# Altium PCB PCB_V1.0.PcbDoc (part 3 of 3)
Units mil, origin at the board's own origin, x right, y up, seen from the top; angles counter-clockwise.
Board outline 2129.51 x 1160.38 mil, 4 copper layers (L1, L2(GND), L3(PWR), L4), stack 62.45 mil thick; 40 components, 40 nets, 186 pads, 192 vias.
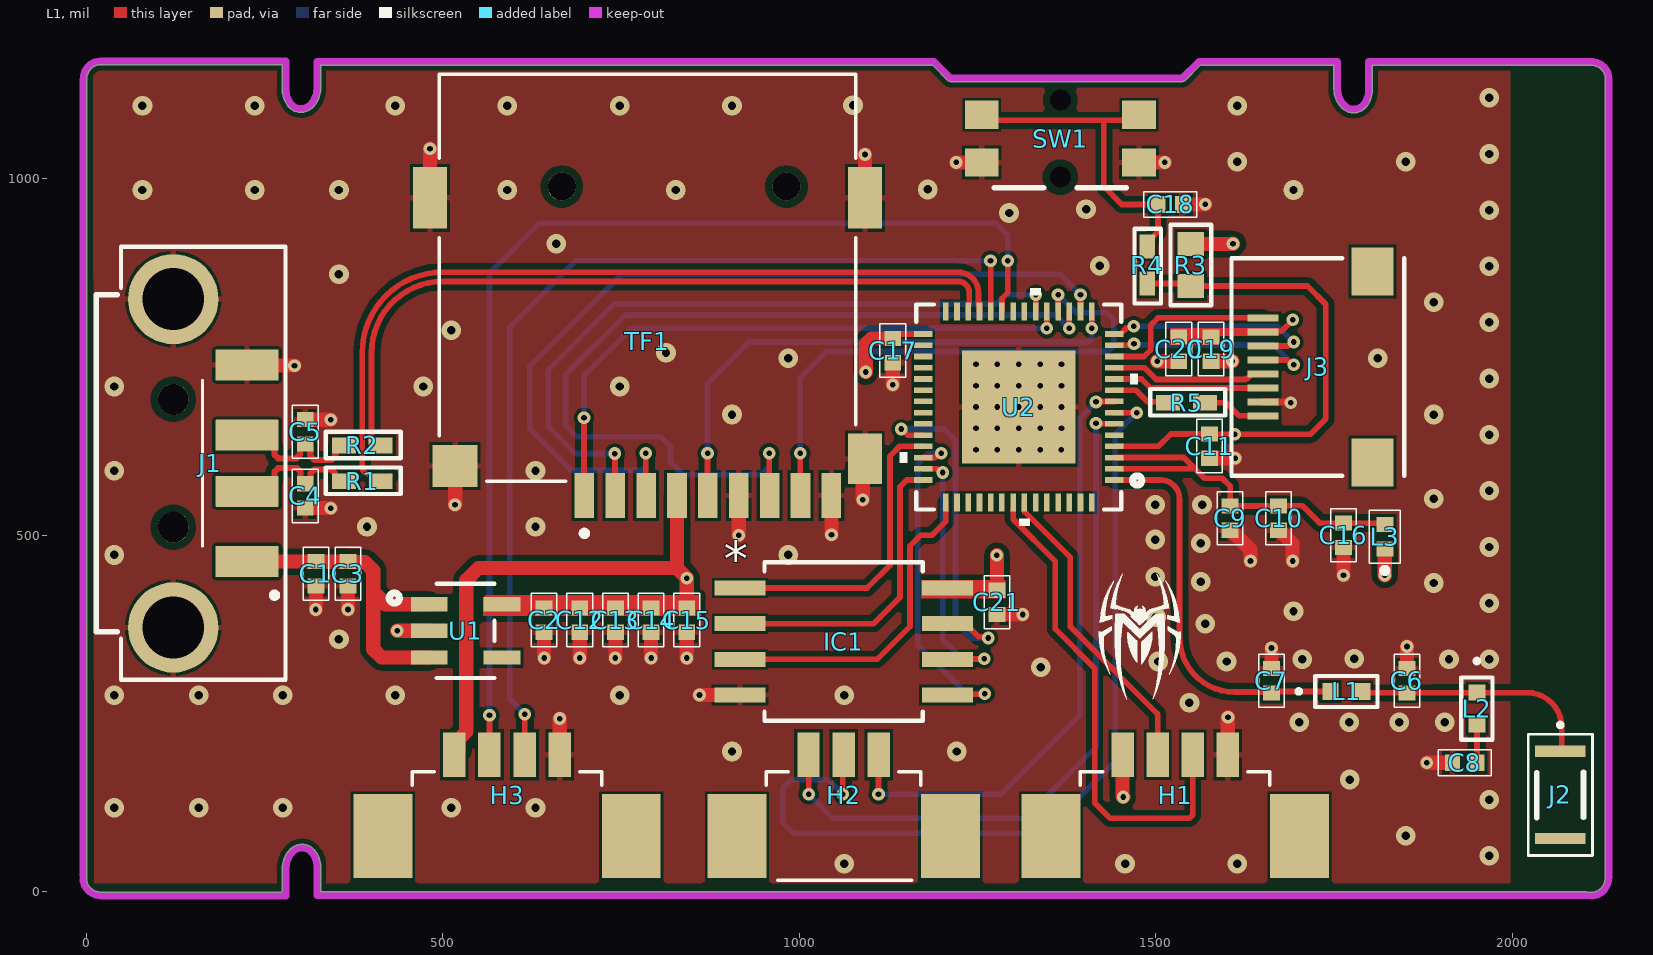
[diagram p0: L1 view]

## Via types
v1: diameter 17.72, hole 7.87, L1 to L4, tented both sides, 100 vias
v2: diameter 27.56, hole 11.81, L1 to L4, tented both sides, 92 vias

## Nets (pads, with @x,y where several pads share a name; then routed paths per layer and width w, separated by ;. In a path a pad name is that pad's centre, name@x,y a point inside that pad or via, vN(x,y) a via of type N, cw(c..) or ccw(c..) an arc to the next point about the centre after c; other vN are vias at no path point) (continued)
SPIHD: (continued)
  L4 w8: v1(1143,649) 1203,649 1218.86,633.14 1218.86,378.14 1241,356 v1(1265,356)
SPIQ: IC1.2 U2.42 | length 431.5
  L1 w8: IC1.2 1104,376 1141,413 1141,568 1150.43,577.43 1173.71,577.43 U2.42
SPIWP: IC1.3 U2.43 | length 461.7
  L1 w8: IC1.3 1109,326 1155,372 1155,485 1170,500 1186,500 1205.27,519.27 U2.43
TXD: H1.2 U2.50 | length 431.1
  L1 w8: U2.50 1315.5,533.5 1380,469 1380,371.79 1502.39,249.39 H1.2
USB_D_N: R1.2 U2.25 | length 1174.1
  L1 w8: 387,719 387,596 ccw(c400,596) 388.33,590.27 389.5,589.1 390.31,588.29 400,582.98 R1.2 ; 387,721.38 387,756 cw(c500,756) 500,869 577,869 1138.38,869 1222.62,869 cw(c1222.62,840.48) 1251.14,840.48 1251.14,823.82 1252.51,822.45 U2.25 ; R1.2@418.67,576 R1.2@425.65,582.98
USB_D_P: R2.2 U2.26 | length 1070.1
  L1 w8: R2.2 406.98,626 400,632.98 400,756 cw(c500,756) 500,856 1222.62,856 cw(c1222.62,840.48) 1238.14,840.48 1238.14,823.82 1236.76,822.45 U2.26
USB_N: C4.2 J1.02 R1.1 | length 191.8
  L1 w8.5: J1.02 232.48,561.63 ccw(c232.48,591.34) 253.48,570.33 258.57,575.41 260.55,575.41 264.17,579.03 264.17,589.27 269.15,594.25 295.64,594.25 300.62,589.27 300.62,578.56 C4.2 308.18,572.18 314.56,578.56 314.56,587.02 319.54,592 343.62,592 348.6,587.02 348.6,582.73 355.33,576 R1.1
USB_P: C5.2 J1.03 R2.1 | length 196.2
  L1 w8.5: J1.03 232.48,640.37 cw(c232.48,610.66) 253.48,631.67 258.57,626.59 260.55,626.59 264.17,622.97 264.17,612.73 269.15,607.75 294.46,607.75 299.44,612.73 299.44,621.79 305.82,628.17 C5.2 307.66,628.17 314.04,621.79 314.04,611.74 320.28,605.5 343.62,605.5 349.47,611.35 349.47,619.27 356.2,626 R2.1
VDD_SPI: C17.2 C21.2 IC1.8 U2.29 | length 532.5
  L1 w8: C17.2 1137.15,782.16 1173.71,782.16 U2.29
  L1 w20: v1(1093,729) 1093,768 1101.01,776.01 C17.2 ; C21.2 v1(1277,472)
  L3(PWR) w20: v1(1093,729) 1093,614 1235,472 v1(1277,472)
pads on no net: H1.SH1 H1.SH2 H2.SH1 H2.SH2 H3.SH1 H3.SH2 J1. J2.2 J3.9 J3.10 SW1.MH1 SW1.MH2 TF1. U1.4 U2.5 U2.21 U2.22 U2.27 U2.28 U2.30 U2.31 U2.32 U2.33 U2.34 U2.35 U2.36 U2.37 U2.44 U2.45 U2.46 U2.47 U2.48 U2.51 U2.52 U2.53 U2.54 U2.55 U2.56

## Polygon pours and split planes (outlines as drawn)
GND on L2(GND) "NONET_L-01_P-001" (solid, remove dead copper, pour order 0): 2,1158 cw(c6.83,1153.17) 6.83,1160 2129,1160 2129,1.41 cw(c2125.59,1.41) 2128,-1 ccw(c2125.59,-3.41) 2125.59,0 -1,0
+3V3 on L3(PWR) "NONET_L-01_P-001" (solid, remove dead copper, pour order 1): 2129,1159 2128,1160 0,1160 0,10 15,-5 16,-4 2117,-4 2133,12
GND on L1 "NONET_L-01_P-001" (solid, remove dead copper, pour order 3): 9.39,1175.91 10.52,1174.79 2134.5,1174.79 2134.5,14.79 2131.62,11.91 11.39,11.91
GND on L4 "NONET_L-01_P-001" (solid, remove dead copper, pour order 2): 5,1161 6.12,1159.88 2130.11,1159.88 2130.11,-0.12 2127.22,-3 7,-3

## Keep-outs
Keep-Out Layer:
  lines w10: -4.54,18.21 ccw(c17.69,18.21) 1.97,2.49 ccw(c21.28,21.8) 21.28,-5.51 280.04,-5.51 280.04,33.39 cw(c312.11,33.39) 289.43,56.07 cw(c302.97,42.54) 302.97,61.68 cw(c302.97,44.61) 315.04,56.68 cw(c294.35,35.99) 323.61,35.99 323.61,-5.13 2109,-5.13 ; -4.39,22.28 -4.39,1126 ; 1798.18,1164.19 1798.18,1123.07 cw(c1768.92,1123.07) 1789.61,1102.38 cw(c1777.54,1114.45) 1777.54,1097.38 cw(c1777.54,1116.52) 1764,1102.99 cw(c1786.68,1125.67) 1754.61,1125.67 1754.61,1164.38 1560.38,1164.38 1537,1141 1212,1141 1188.62,1164.38 323.61,1164.38 323.61,1126.48 cw(c291.54,1126.48) 314.22,1103.8 cw(c300.68,1117.34) 300.68,1098.19 cw(c300.68,1115.26) 288.61,1103.19 cw(c309.3,1123.89) 280.04,1123.89 280.04,1164.89 58.8,1164.89 27.12,1164.89 19.33,1164.89 ccw(c19.33,1142.66) 3.61,1158.38 ccw(c22.92,1139.07) -4.39,1139.07 ; 1798.37,1164.38 2109.29,1164.38 cw(c2109.29,1137.07) 2128.61,1156.38 cw(c2112.89,1140.66) 2135.12,1140.66 2135.12,1132.87 ; 2111.28,-5.51 ccw(c2111.28,16.72) 2127,1 ccw(c2107.69,20.31) 2135,20.31 2135,1133 ; -4.39,1139.07 -4.39,281.38 -4.39,1139.07

## Other copper
L1:
  pour cut-out: 1997,-0.12 1997,1159.88 2130.11,1159.88 2130.11,-0.12
  region net +3V3: 557,413 560,416 860,416 860,388 859,387 557,387
  region net VDD_SPI: 1289,412 1171,412 1171,437 1289,437
  region net +3V3: 1672,790 1521,790 1520,789 1542,767 1589,767 1589,778 1591,780 1672,780
  region net +3V3: 1520,789 1520,767 1589,767 1589,789
L2(GND):
  pour cut-out: 1997,-0.12 1997,1159.88 2130.11,1159.88 2130.11,-0.12
L3(PWR):
  pour cut-out: 1997,-0.12 1997,1159.88 2130.11,1159.88 2130.11,-0.12
L4:
  pour cut-out: 1997,-0.12 1997,1159.88 2130.11,1159.88 2130.11,-0.12

## Silkscreen, mask and mechanical layers (free items; w line width, h text height)
Top Overlay:
  drawing of 15 lines, arcs and shapes, not listed
Bottom Overlay:
  lines w10: 458,20 458,169 722,169 722,167 722,20 458,20 ; 955,18 1171,18 1171,165 955,165 955,18 ; 1395,23 1659,23 1659,171 1659,173 1395,173 1395,23
  text "(c)Design by nq_minh_" at 1472,595.66 h50
  text "+3V3" at 1466,145 h30 r90
  text "+3V3" at 529,141 h30 r90
  text "GPIO2" at 1072,130 h25 r90
  text "GPIO3" at 1123,128 h25 r90
  text "GND" at 1618,126.15 h30 r90
  text "GND" at 681,122.15 h30 r90
  text "GPIO1" at 1023,123 h25 r90
  text "RXD" at 1567,123 h30 r90
  text "TXD" at 1517,119.86 h30 r90
  text "SDA" at 580,115.86 h30 r90
  text "SCL" at 631,109.01 h30 r90

## Text inside footprints (layer, text, board x,y; h text height)
IC1: Top Overlay "*" at 894.03,441.97 h50